# Altium PCB UWB-NODE.PcbDoc
Units mm, origin at the board's own origin, x right, y up, seen from the top; angles counter-clockwise.
Board outline 54.72 x 25.93 mm, 2 copper layers (Top Layer, Bottom Layer); 44 components, 41 nets, 187 pads, 243 vias.
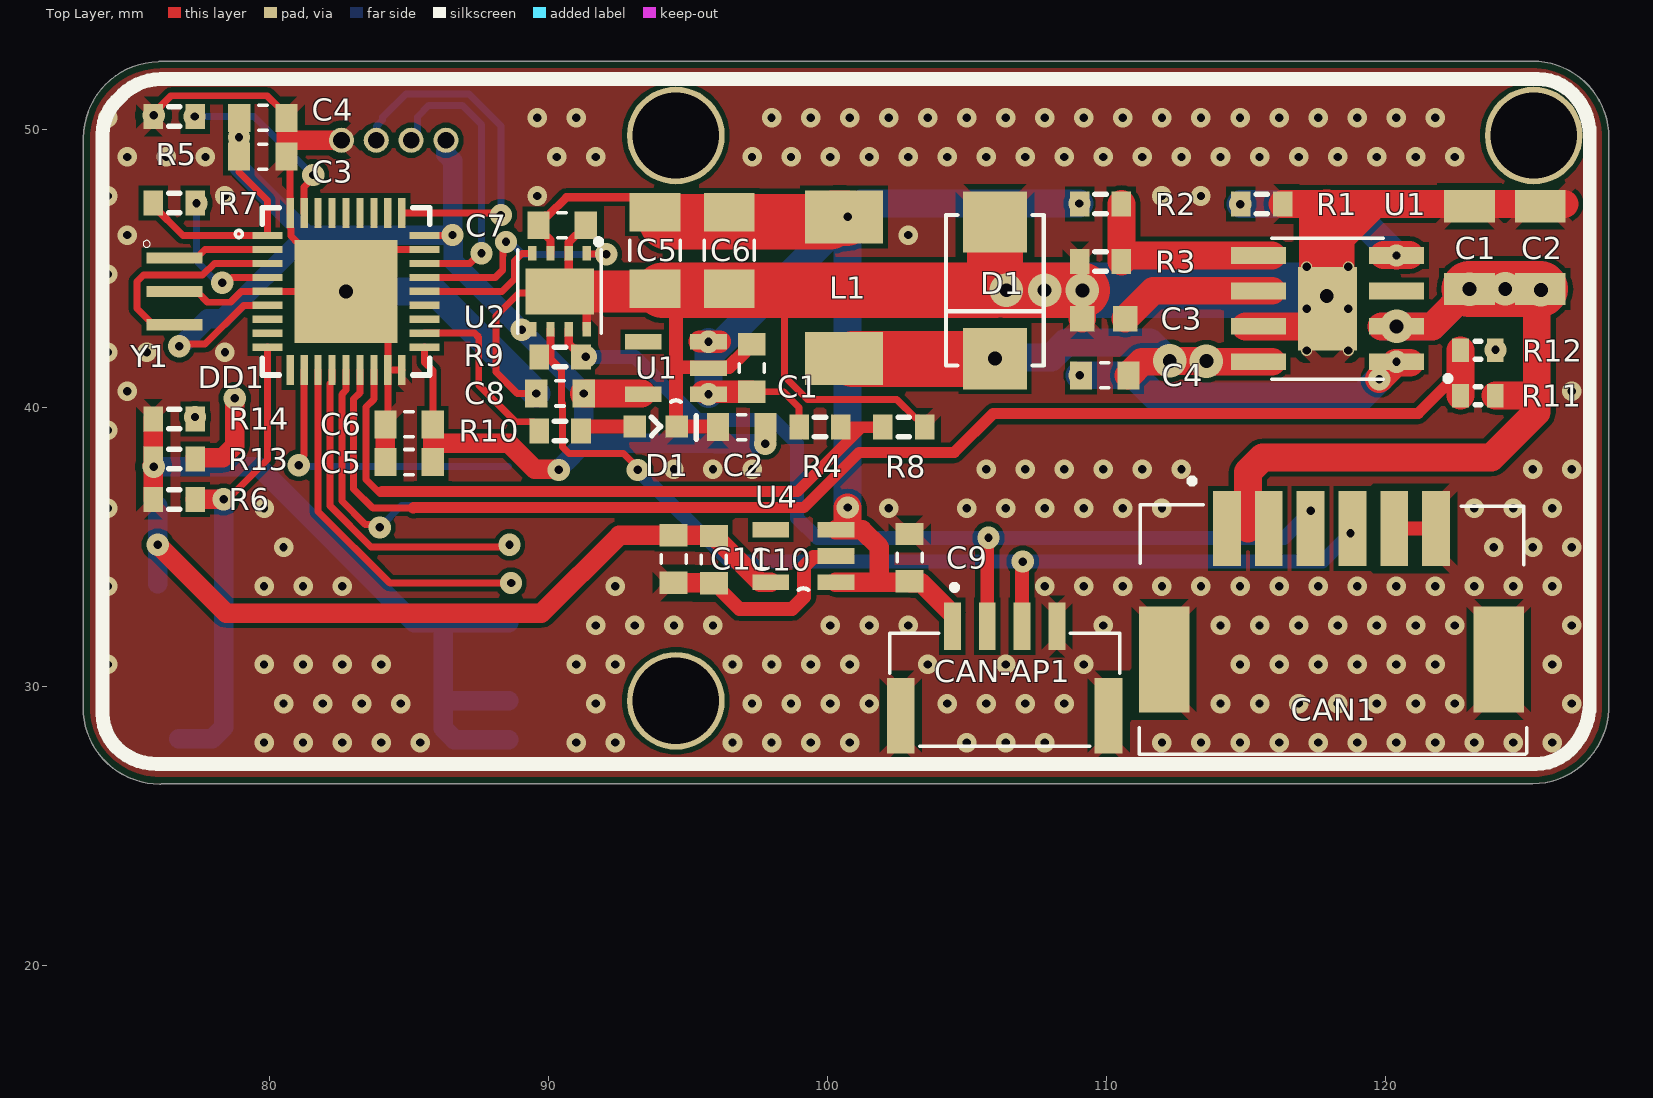
[diagram p0: Top Layer view]
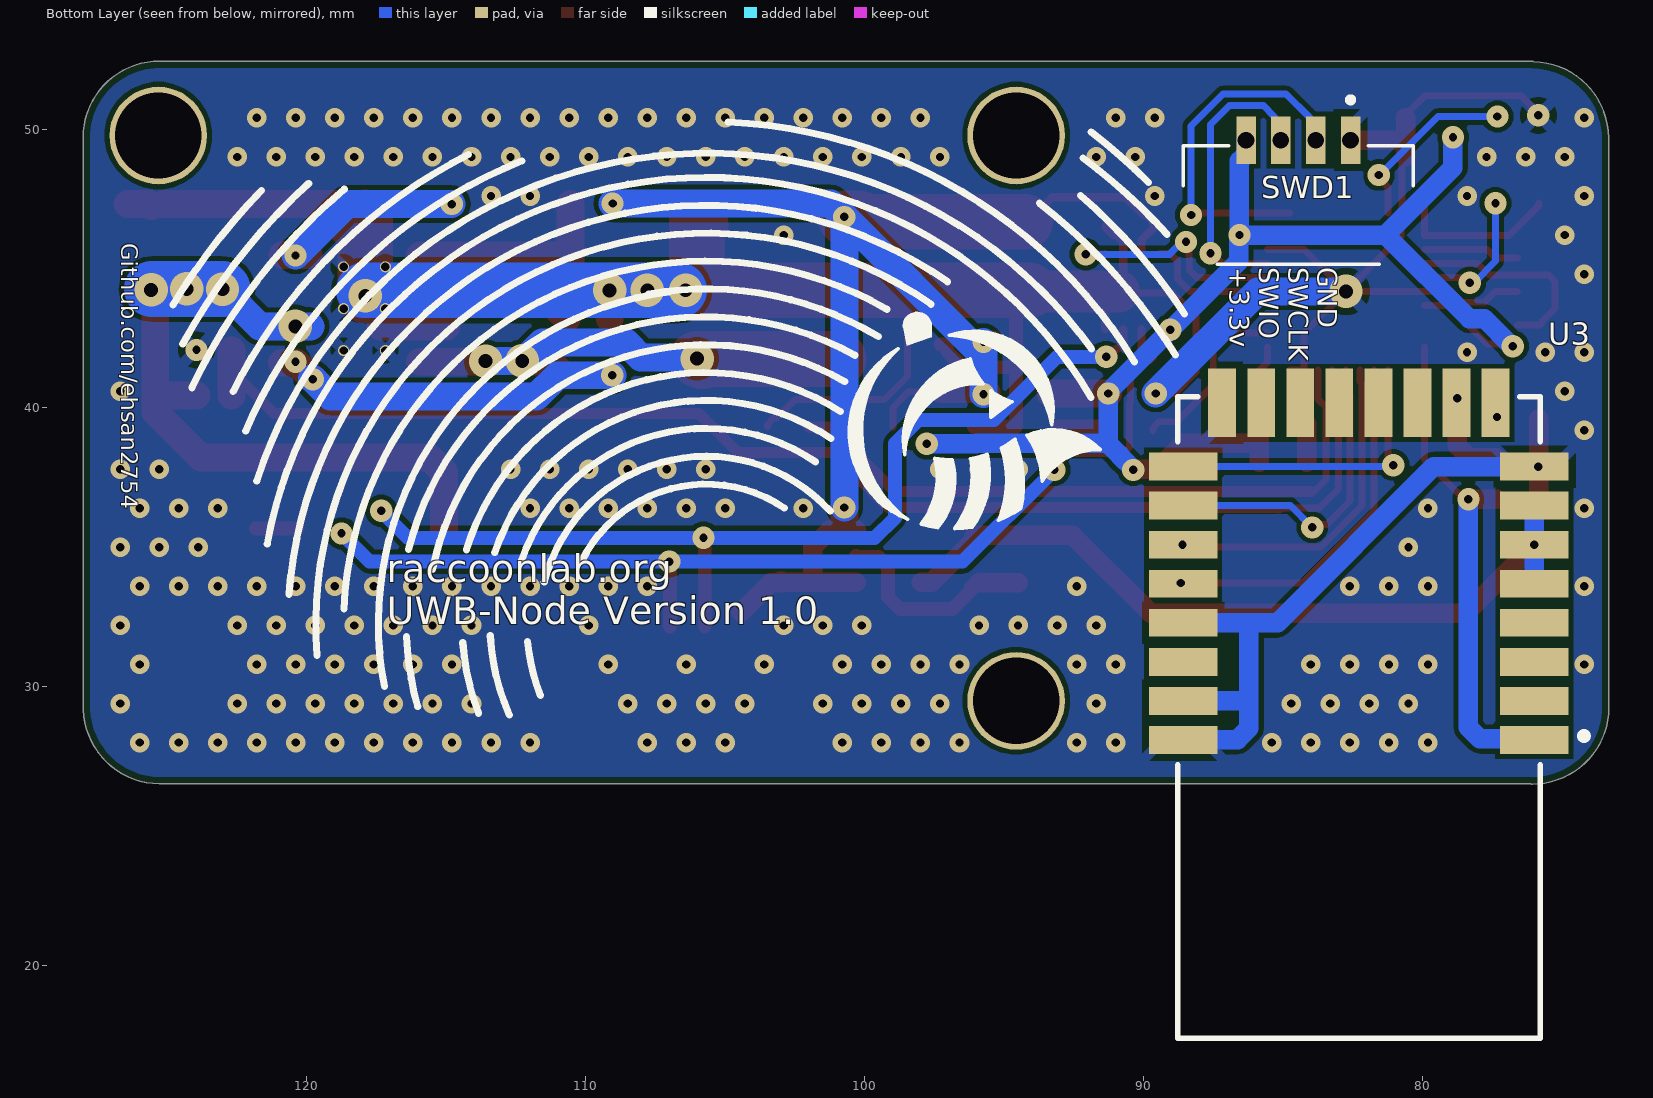
[diagram p1: Bottom Layer view, seen from below]
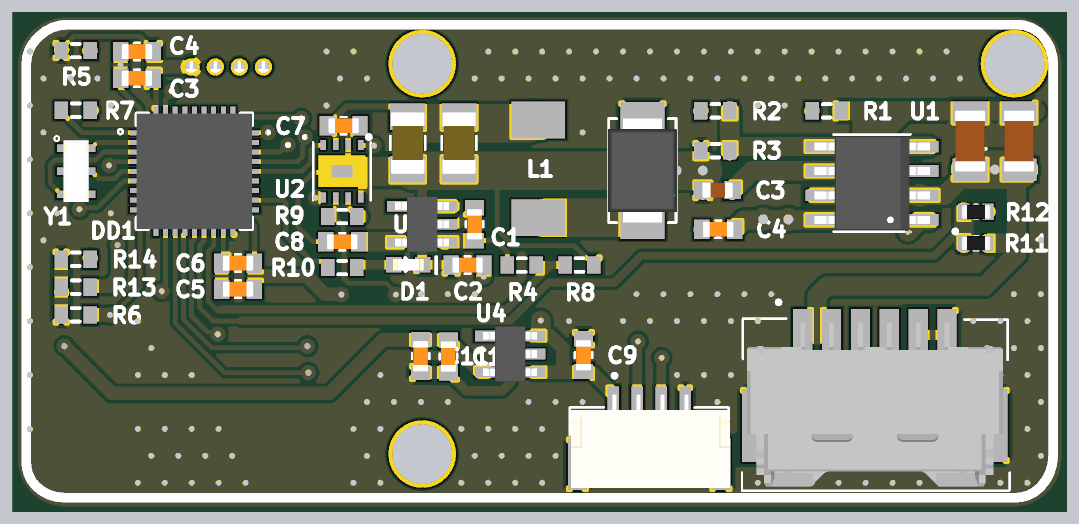
[diagram p2: 3D render of the assembled board from above, using the file's embedded part models]

## Layer stack, top to bottom
Top Solder: solder mask 0.0102, Solder Resist, Dk 3.5
Top Layer: signal copper 0.0356
Dielectric 1: dielectric 0.32, FR-4, Dk 4.8
Bottom Layer: signal copper 0.0356
Bottom Solder: solder mask 0.0102, Solder Resist, Dk 3.5

## Board outline
73.311,29.261 ccw(c76.061,29.261) 76.061,26.511 ccw(c76.061,26.761) 76.127,26.52 125.269,26.52 ccw(c125.269,26.77) 125.292,26.521 ccw(c125.269,29.271) 128.018,29.184 ccw(c127.77,29.22) 128.02,29.22 128.02,49.599 ccw(c127.77,49.599) 128.02,49.619 ccw(c127.779,49.689) 128.029,49.689 ccw(c125.279,49.689) 125.279,52.439 ccw(c125.279,52.189) 125.21,52.429 ccw(c125.189,52.18) 125.189,52.43 76.08,52.43 ccw(c76.08,52.18) 76.004,52.419 ccw(c76.071,49.669) 73.321,49.696 ccw(c73.57,49.67) 73.32,49.67 73.32,29.328 ccw(c73.561,29.261)

## Design rules (kind name [scope] priority, off if disabled: settings)
BoardOutlineClearance [All] p1: gap=0.25 ignorepadtopadclearanceinfootprint=FALSE
Clearance [All] p1: gap=0.17 ignorepadtopadclearanceinfootprint=FALSE
ComponentClearance [All] p1: gap=0.254 collisioncheckmode=3 verticalgap=2540 showdistances=FALSE
FanoutControl Fanout_SOIC [IsSOIC] p3: bgadir=Out bgaviamode=Closest fanoutstyle=Auto fanoutdirection=Alternating viagrid=0.025 // Fanout_SOIC (Default Rule)
FanoutControl Fanout_Small [(CompPinCount < 5)] p4: bgadir=Out bgaviamode=Closest fanoutstyle=Auto fanoutdirection=OutThenIn viagrid=0.025 // Fanout_Small (Default Rule)
FanoutControl Fanout_Default [All] p5: bgadir=In bgaviamode=Closest fanoutstyle=Auto fanoutdirection=Alternating viagrid=0.025 // Fanout_Default (Default Rule)
HoleSize [All] p1: absolutevalues=TRUE maxlimit=4.5 minlimit=0.3 maxpercent=80.000 minpercent=20.000
HoleToHoleClearance [All] p1: gap=0.4 allowstackedmicrovias=TRUE
MinimumSolderMaskSliver [All] p1: minsoldermaskwidth=0.15
PlaneClearance [All] p1: clearance=0.2
PlaneConnect [All] p1: planeconnectstyle=Relief reliefexpansion=0.5 reliefentries=4 reliefconductorwidth=0.2 reliefairgap=0.25
PolygonConnect PolygonConnect_1 [InNet('GND')] p1: connectstyle=Relief reliefconductorwidth=0.4 reliefentries=4 polygonreliefangle="45 Angle" airgapwidth=0.254
PolygonConnect [All] p2: connectstyle=Relief reliefconductorwidth=0.3 reliefentries=4 polygonreliefangle="90 Angle" airgapwidth=0.16
RoutingCorners [All] p1: cornerstyle=45-Degree minsetback=2.5 maxsetback=2.5
RoutingPriority [All] p1 off: routingpriority=0
RoutingVias [All] p1: holewidth=0.3 width=0.7 viastyle="Through Hole" minholewidth=0.3 minwidth=0.7 maxholewidth=0.8 maxwidth=1.2
SilkToSilkClearance [All] p1: silktosilkclearance=0
SilkToSolderMaskClearance [IsPad] p1: minsilkscreentomaskgap=0 clearancetoexposedcopper=TRUE
SolderMaskExpansion [All] p1: expansion=0.1 istentingtop=FALSE
Width [All] p1: maxlimit=5 minlimit=0.17 preferedwidth=0.3
17 further rules are at their usual default settings.

## Classes and differential pairs
component class STM32F103T8: C1 C2 C3 C4 C5 C6 C7 C8 C9 C10 C11 CAN1 CAN-AP1 D1 DD1 R4 R5 R6 R7 R8 R9 R10 R11 R12 R13 R14 SWD1 U1 U2 U3 U4 Y1
component class DCDC-LMR16030: C1 C2 C3 C4 C5 C6 D1 L1 R1 R2 R3 U1

## Components (designator, comment, footprint, x,y, rotation, side; value= is the part's Value field where it differs from the comment)
C1 "GX035C104MAT2-500" *CAPC1608X90 97.29,41.43 r90 top value=0.1u
C1 "GRM31CR71H225KA88L" *CAP3216X125N 123.029,45.747 r90 top value=2.2u
C2 "GX035C104MAT2-500" *CAPC1608X90 96.93,39.31 r180 top value=0.1u
C2 "GRM31CR71H225KA88L" *CAP3216X125N 125.569,45.747 r90 top value=2.2u
C3 "GX035C104MAT2-500" *CAPC1608X90 79.753,49.01 r0 top value=0.1u
C3 "GRM188R71C105KA12D" CAPC1608X90N 109.913,43.199 r0 top value=1u
C4 "GX035C104MAT2-500" *CAPC1608X90 79.756,50.4 r0 top value=0.1u
C4 "GX035C104MAT2-500" *CAPC1608X90 109.948,41.167 r180 top value=0.1u
C5 "GX035C104MAT2-500" *CAPC1608X90 85.005,38.06 r180 top value=0.1u
C5 "GRM31CR61A476KE15L" *CAPC3216X125N 93.819,45.651 r90 top value=47u
C6 "GX035C104MAT2-500" *CAPC1608X90 85.005,39.41 r180 top value=0.1u
C6 "GRM31CR61A476KE15L" *CAPC3216X125N 96.486,45.651 r90 top value=47u
C7 "GX035C104MAT2-500" *CAPC1608X90 90.49,46.55 r0 top value=0.1u
C8 "GX035C104MAT2-500" *CAPC1608X90 90.417,40.52 r180 top value=0.1u
C9 "GX035C104MAT2-500" *CAPC1608X90 102.95,34.63 r90 top value=0.1u
C10 "GX035C104MAT2-500" *CAPC1608X90 95.93,34.56 r270 top value=0.1u
C11 "GX035C104MAT2-500" *CAPC1608X90 94.49,34.58 r270 top value=10UF
CAN1 "502585-0670" MOLEX_502585-0670 118.08,35.479 r0 top
CAN-AP1 "SM04B-GHS-TB(LF)(SN)-" JST_SM04B-GHS-TB(LF)(SN)- 106.36,29.89 r0 top
D1 "0603-LED-BLUE" *LEDM1608X80_LTE-C1906R-14(Primary) 93.85,39.335 r180 top
D1 "SK56" *SMB_P6SMB62AT3G(Primary) 106.011,44.217 r270 top
DD1 "STM32F103T8" *QFN50P600X600X100-37N 82.74,44.18 r0 top
L1 "IHLP2020BZER100M01" IHLP 100.601,44.307 r270 top
R1 "Res3" J1-0603 115.577,47.317 r180 top value=56k
R2 "Res3" J1-0603 109.798,47.317 r180 top value=56k
R3 "RC0603FR-0710KL" J1-0603 109.798,45.25 r0 top value=10k
R4 "RC0603FR-0710KL" J1-0603 99.74,39.31 r180 top value=10k
R5 "RC0603FR-0710KL" J1-0603 76.577,50.45 r0 top value=10k
R6 "RC0603FR-0710KL" J1-0603 76.577,36.72 r0 top value=10k
R7 "RC0603FR-0710KL" J1-0603 76.577,47.35 r0 top value=10k
R8 "RC0603FR-0710KL" J1-0603 102.74,39.31 r180 top value=10k
R9 "Res3" J1-0603 90.417,41.83 r0 top value=120
R10 "Res3" J1-0603 90.417,39.18 r0 top value=330
R11 "180K" "RES 0603 (1608X06L)" 122.71,40.44 r0 top
R12 "10K" "RES 0603 (1608X06L)" 123.954,42.07 r180 top
R13 "RC0603FR-0710KL" J1-0603 76.577,38.165 r0 top value=10k
R14 "RC0603FR-0710KL" J1-0603 76.577,39.61 r0 top value=10k
SWD1 "BM04B-GHS-TBT(LF)(SN)(N)" JST_BM04B-GHS-holes 84.45,46.249 r180 bottom
U1 "SPX3819M5-L-3-3/TR" *SOT95P280X145-5N 94.57,41.43 r180 top value=3V3
U1 "LMR16030SDDAR" "*SOIC127P600X170-9N - duplicate" 117.937,43.561 r180 top
U2 "TJA1042" SOT782-1 90.4,44.18 r180 top
U3 "DWM1000" DECW-DWM1000-24_V 82.28,28.895 r0 bottom
U4 "SPX3819M5-L-3-3/TR" *SOT95P280X145-5N 99.14,34.69 r180 top value=3V3
Y1 "CSTCE8M00G55-R0" *OSC_CSTCE8M00G55-R0 76.59,44.18 r270 top

## Footprints (in the part's own frame and the unit in brackets; to place one, negate y for a bottom-side part, rotate by r counter-clockwise, add the part's x,y. Pads: shape width x height; smd on the part's side, far side on the other; paste and mask are expansions set on the pad)
*CAP3216X125N [mm]
  rect 1.15x1.82 smd: 1(-1.485,0) 2(1.485,0)
  body extent -1.6,-0.8 1.6,0.8, height 1.22
*CAPC1608X90 [mm]
  rect 0.8x1 smd: 1(-0.85,0) 2(0.85,0)
  silkscreen extent -0.15,-0.45 0.15,0.45, body extent -0.8,-0.4 0.8,0.41, height 0.88
*CAPC3216X125N [mm]
  rect 1.38x1.82 smd: 1(-1.369,0) 2(1.369,0)
  silkscreen extent -0.36,-0.9 0.36,0.9, body extent -1.6,-0.87 1.6,0.87, height 1.71
*LEDM1608X80_LTE-C1906R-14(Primary) [mm]
  rect 0.8x0.8 smd: A(0.75,0) C(-0.75,0)
  silkscreen extent -1.45,-0.38 0.16,0.45, body extent -0.8,-0.3 0.8,0.3, height 1.15
*OSC_CSTCE8M00G55-R0 [mm]
  rect 0.4x2 smd: 1(-1.2,0) 2(0,0) 3(1.2,0)
  silkscreen extent -1.83,-1.13 -1.57,-0.87, body extent -1.6,-0.65 1.6,0.65, height 1
*QFN50P600X600X100-37N [mm]
  rect 1.08x0.26 smd: 1(-2.815,2) 2(-2.815,1.5) 3(-2.815,1) 4(-2.815,0.5) 5(-2.815,0) 6(-2.815,-0.5) 7(-2.815,-1) 8(-2.815,-1.5) 9(-2.815,-2) 19(2.815,-2) 20(2.815,-1.5) 21(2.815,-1) 22(2.815,-0.5) 23(2.815,0) 24(2.815,0.5) 25(2.815,1) 26(2.815,1.5) 27(2.815,2)
  rect 0.26x1.08 smd: 10(-2,-2.815) 11(-1.5,-2.815) 12(-1,-2.815) 13(-0.5,-2.815) 14(0,-2.815) 15(0.5,-2.815) 16(1,-2.815) 17(1.5,-2.815) 18(2,-2.815) 28(2,2.815) 29(1.5,2.815) 30(1,2.815) 31(0.5,2.815) 32(0,2.815) 33(-0.5,2.815) 34(-1,2.815) 35(-1.5,2.815) 36(-2,2.815)
  rect 3.7x3.7 smd: 37(0,0)
  silkscreen extent -3.97,-3 3,3, body extent -3,-3 3,3, height 1
*SMB_P6SMB62AT3G(Primary) [mm]
  rect 2.2x2.3 smd: A(-2.45,0) C(2.45,0)
  silkscreen extent -2.7,-1.75 2.7,1.75, body extent -2.72,-1.78 2.72,1.78, height 2.49
"*SOIC127P600X170-9N - duplicate" [mm]
  rect 1.97x0.6 smd: 1(-2.475,1.905) 2(-2.475,0.635) 3(-2.475,-0.635) 4(-2.475,-1.905) 5(2.475,-1.905) 6(2.475,-0.635) 7(2.475,0.635) 8(2.475,1.905)
  round 0.4 hole 0.3: 9(-0.75,1.5) 9(-0.75,0) 9(-0.75,-1.5) 9(0.75,1.5) 9(0.75,0) 9(0.75,-1.5)
  rect 2.13x3 smd: 9(0,0)
  silkscreen extent -4.42,-2.52 2,2.6, body extent -3,-2.45 3,2.45, height 1.69
*SOT95P280X145-5N [mil]
  rect 52x22 smd: 1(-46,37) 2(-46,0) 3(-46,-37) 4(46,-37) 5(46,37)
  silkscreen extent -7,46 7,48, body extent -55,-57 55,57, height 57
CAPC1608X90N [mm]
  rect 0.89x0.93 smd: 1(-0.77,0) 2(0.77,0)
  body extent -0.8,-0.4 0.8,0.4, height 0.9
DECW-DWM1000-24_V [mm] "SMD, 24-Leads, Body 23x13mm, Pitch 1.4mm"
  rect 2.45x1 smd: 1(-6.295,0.8) 2(-6.295,-0.6) 3(-6.295,-2) 4(-6.295,-3.4) 5(-6.295,-4.8) 6(-6.295,-6.2) 7(-6.295,-7.6) 8(-6.295,-9) 17(6.295,-9) 18(6.295,-7.6) 19(6.295,-6.2) 20(6.295,-4.8) 21(6.295,-3.4) 22(6.295,-2) 23(6.295,-0.6) 24(6.295,0.8)
  rect 1x2.45 smd: 9(-4.9,-11.295) 10(-3.5,-11.295) 11(-2.1,-11.295) 12(-0.7,-11.295) 13(0.7,-11.295) 14(2.1,-11.295) 15(3.5,-11.295) 16(4.9,-11.295)
  silkscreen extent -8.19,-11.5 6.5,11.5, body extent -6.5,-11.5 6.5,11.5, height 4
IHLP [mil]
  rect 75x110 smd: 1(-100,0) 2(100,0)
  body extent -100,-100 100,100, height 79
J1-0603 [mm] "Chip Resistor, Body 1.6x0.8mm, IPC High Density"
  rect 0.7x0.9 smd: 1(-0.75,0) 2(0.75,0)
  silkscreen extent -0.2,-0.35 0.2,0.35, body extent -0.85,-0.48 0.85,0.48, height 0.9
JST_BM04B-GHS-holes [mm]
  rect 0.7x1.7 / inner rect 0.6x1.7 / far side round 0.9 hole 0.6: 1(1.875,3.35) 2(0.625,3.35) 3(-0.625,3.35) 4(-1.875,3.35)
  silkscreen extent -4.13,-1.1 4.13,4.9, body extent -4.12,-1.02 4.12,3.93, height 4.15
JST_SM04B-GHS-TB(LF)(SN)- [mm]
  rect 0.6x1.7 smd: 1(-1.875,2.275) 2(-0.625,2.275) 3(0.625,2.275) 4(1.875,2.275)
  rect 1x2.7 smd: SH1(-3.725,-0.925) SH2(3.725,-0.925)
  silkscreen extent -4.13,-2.02 4.13,3.77, body extent -4.06,-2.16 4.19,2.69, height 4.35
MOLEX_502585-0670 [mm]
  rect 1x2.7 smd: 1(-3.75,0.2) 2(-2.25,0.2) 3(-0.75,0.2) 4(0.75,0.2) 5(2.25,0.2) 6(3.75,0.2)
  rect 1.8x3.8 smd: P1(-6,-4.5) P2(6,-4.5)
  silkscreen extent -6.9,-7.9 7,2, body extent -6.65,-7.68 6.65,0.82, height 6.41
"RES 0603 (1608X06L)" [mm] "Chip Resistor, 2-Leads, Body 1.6x0.8mm, IPC High Density _ (0.063W)"
  rect 0.6x0.85 smd: 1(0,0) 2(1.244,0)
  silkscreen extent 0.52,-0.33 0.72,0.33, body extent -0.14,-0.38 1.38,0.38, height 0.45
SOT782-1 [mm]
  rect 0.3x0.525 smd: 1(-0.975,-1.362) 2(-0.325,-1.362) 3(0.325,-1.362) 4(0.975,-1.362) 5(0.975,1.362) 6(0.325,1.362) 7(-0.325,1.362) 8(-0.975,1.362)
  rect 2.45x1.65 smd paste-2: P$9(0,0)
  silkscreen extent -1.5,-1.88 1.5,1.5, body extent -1.52,-1.52 1.52,1.52, height 0.85

## Part data
C1 C2 C3 C4 C4 C5 C6 C7 C8 C9 C10 C11: "Cap Thin Film 0.1uf 50v 0603", Package="0603 AVX", MF=AVX, Pacage Metric=1608, SnapEDA_Link=https://www.snapeda.com/parts/GX035C104MAT2-500/AVX/view-part/?ref=snap, Type=SMD
  C1 C2 C9 C10: MP=GX035C104MAT2-500
  C3 C4 C4 C5 C6 C7 C8: MP="GX035C104MAT2-500 or CL10B104JB8NNNC"
  C11: ChipDip_Link=https://www.chipdip.ru/product0/8004208718, MP=GX035C104MAT2-500
C1 C2: "1206 2.2 uF 50 V В±10% Tolerance X7R SMT Multilayer Ceramic Capacitor", Package="1206 Murata", MF="Murata Electronics", MP=GRM31CR71H225KA88L, SnapEDA_Link=https://www.snapeda.com/parts/GRM31CR71H225KA88L/Murata%20Electronics%20North%20America/view-part/?ref=snap, Type=SMD
C3: "SMD Capacitor X7R(EIA) with Capacitance: 1.0uF Tol. 10%. Rated Voltage: 16Vdc", Package=0603, ChipDip_Link=https://www.chipdip.ru/product/grm188r71c105ka12d, HelpURL=https://static.chipdip.ru/lib/428/DOC005428493.pdf, MF="Murata Electronics", MP=GRM188R71C105KA12D, Pacage Metric=1608, SnapEDA_Link=https://www.snapeda.com/parts/GRM188R71C105KA12D/Murata%20Electronics%20North%20America/view-part/228340/?ref=snap, Type=SMD
C5 C6: "Multilayer Ceramic Capacitor, GRM Series, 47 - F, - 10%, X5R, 10 V, 1206 [3216 Metric]", Package="1206 Murata Electronics", MF="Murata Electronics", MP=GRM31CR61A476KE15L, SnapEDA_Link=https://www.snapeda.com/parts/GRM31CR61A476KE15L/Murata%20Electronics%20North%20America/view-part/?ref=snap, Type=SMD
CAN1: "1.50mm Pitch, CLIK-Mate PCB Receptacle, Single Row, Surface Mount, Right-Angle, Tin Plating, Positive Lock, 6 Circuits, Natural", Package=None, MF=Molex, MP=502585-0670, SnapEDA_Link=https://www.snapeda.com/parts/502494-0670/Molex/view-part/?ref=snap, System=Connector, Type=SMD
CAN-AP1: "Connector Header Surface Mount, Right Angle 4 position 0.049 _1.25mm_", Package=None, ChipDip_Link=https://www.chipdip.ru/product/sm04b-ghs-tb-lf-sn-gh-1.25mm-header-side-ent, HelpURL=http://www.farnell.com/datasheets/2082975.pdf, MF="JST Sales", MP=SM04B-GHS-TB(LF)(SN), SnapEDA_Link=https://www.snapeda.com/parts/SM04B-GHS-TB%28LF%29%28SN%29-/JST%20Sales%20America%20Inc./view-part/2759740/?ref=snap, System=Connector
D1: library part LTE-C1906R-14, "LED IrLED Chip LED 2-Pin SMD T/R", Package="0603 Lite-On", MP=0603-LED-BLUE, SnapEDA_Link=https://www.snapeda.com/parts/LTE-C1906R-14/Lite-On%20Inc./view-part/?ref=snap, Type=SMD
D1: "Диод Шоттки 5А 60В [SMB / DO-214AA]", Package="DO-214 Littelfuse", ChipDip_Link=https://www.chipdip.ru/product/sk56, MF="Littelfuse Inc.", MP=SK56, SnapEDA_Link=https://www.snapeda.com/parts/P6SMB62AT3G/Littelfuse%20Inc./view-part/?ref=snap, Type=SMD
DD1: "STM32F103T8U6, Микроконтроллер 32BIT ARM 64K FLASH [VFQFPN-36]", Package=VFQFPN-36, ChipDip_Link=https://www.chipdip.ru/product/stm32f103t8u6-2, HelpURL=http://www.st.com/stonline/products/literature/ds/13587.pdf, MF=STM, MP=STM32F103T8U6, SnapEDA_Link=https://www.snapeda.com/parts/STM32F103T8U6TR/STMicroelectronics/view-part/?ref=search&t=STM32F103T8U6, Type=SMD
L1: "10ÂµH Shielded Molded Inductor 2.3A 199mOhm Max Nonstandard", Package="Nonstandard Vishay", ChipDip_Link=https://www.chipdip.ru/product/ihlp2020bzer100m11-inductor-ihlp-smd-2020-10, HelpURL=http://www.vishay.com/docs/34253/ihlp-2020bz-01.pdf, MF="Vishay Dale", MP=IHLP2020BZER100M01, SnapEDA_Link=https://www.snapeda.com/parts/IHLP2020BZER100M01/Vishay%20Dale/view-part/44808/?ref=snap, Type=SMD
R1 R2 R10: "Resistor", Package=R0603, Pacage Metric=1608, Type=SMD
  R1 R2: ChipDip_Link=https://www.chipdip.ru/product0/9000079754, HelpURL=https://www.chipdip.ru/product0/9000079754, MP=RC0603FR-0756KL
  R10: ChipDip_Link=https://www.chipdip.ru/product0/9000079628, HelpURL=https://www.chipdip.ru/product0/9000079628, MP=RC0603FR-07330RL
R3 R4 R5 R6 R7 R8 R13 R14: "10 kOhms 1 0.1 W 1 10 W Chip Resistor 0603 1608 Metric Thick Film", Package=R0603, ChipDip_Link=https://www.chipdip.ru/product0/9000079736, HelpURL=https://www.chipdip.ru/product0/9000079736, MF="Yageo or NXP", MP="10K 1% 0603", Pacage Metric=1608, SnapEDA_Link=https://www.snapeda.com/parts/RC0603FR-0710KL/Yageo/view-part/?ref=dk&t=RC0603FR-0710KL&con_ref=None, Type=SMD
R9: "120 Ohms 1 0.1 W 1 10 W Chip Resistor 0603 1608 Metric Thick Film", Package=R0603, ChipDip_Link=https://www.chipdip.ru/product0/9000079618, HelpURL=https://www.chipdip.ru/product0/9000079618, MP=RC0603FR-07120RL, Pacage Metric=1608, Type=SMD
R11 R12: library part Resistor, "Resistor", Power="1/8 W", Tolerance=5%
SWD1: "Conn Shrouded Header HDR 4 POS 1.25mm Solder ST SMD Reel", Package=None, Instructions="Do not install", MF="JST Sales", MP=SM04B-GHS-TB(LF)(SN), SnapEDA_Link=https://www.snapeda.com/parts/BM04B-GHS-TBT%28LF%29%28SN%29%28N%29/JST%20Sales%20America%20Inc./view-part/?ref=snap, System=Connector, Type=SMD
U1 U4: library part SPX3819M5-L, "Low Dropout Voltage Regulator, Adjustable 0.5A, В±1%, 2.5 to 16 Vin, 5-Pin SOT-23", Package="SOT-23-5 Exar", ChipDip_Link=https://www.chipdip.ru/product1/8003455237, HelpURL=http://www.farnell.com/datasheets/2614478.pdf, MF="MaxLinear, Inc.", MP=SPX3819M5-L-3-3/TR, SnapEDA_Link=https://www.snapeda.com/parts/SPX3819M5-L/MaxLinear%2C%20Inc./view-part/?ref=snap, Type=SMD
U1: "LMR16030SDDAR, Conv DC-DC 4.3V to 60V Step Down Single-Out 1V to 50V 3A Automotive 8-Pin HSOP EP T/R", Package="PowerSOIC-8 Texas Instruments", ChipDip_Link=https://www.chipdip.ru/product1/8003448566, HelpURL=https://www.ti.com/lit/ds/symlink/lmr16030.pdf, MF="Texas Instruments", MP=LMR16030SDDAR, SnapEDA_Link=https://www.snapeda.com/parts/TPS54560DDA/Texas%20Instruments/view-part/?ref=snap, Type=SMD
U2: "1/1 Transceiver Half CANbus 8-SO", Package="VDFN-8 NXP USA", ChipDip_Link=https://www.chipdip.ru/product1/8002840332, HelpURL=https://static.chipdip.ru/lib/583/DOC001583059.pdf, MF="NXP USA", MP=TJA1042, SnapEDA_Link=https://www.snapeda.com/parts/TJA1042/NXP%20USA%20Inc./view-part/900919/?ref=snap, Type=SMD
U3: library part CMP-2000-05094-1, "DW M1000 IEEE 802.15.4 -2011 UWB Transceiver Module", Current - Receiving=64mA, Current - Transmitting=31mA, Frequency=3.5GHz~6.5GHz, Manufacturer=Decawave, Operating Temperature=-40degC~85degC, Package / Case=Module, Power - Output=-, Standard Package=500, Voltage - Supply=2.8V~3.6V, Antenna Type=Integrated,Chip, Category=RF/IFandRFID, Data Rate=6.8Mbps, Datasheet URL=http://www.decawave.com/sites/default/files/resources/dwm1000-datasheet-v1.3.pdf, Datasheet Version="Rev. V1.0, 12/2015", Design Resources=DevelopmentToolSelector, Family=RFTransceiverModules, Featured Product=ScenSorDWM1000Module, Manufacturer URL=http://www.decawave.com/, Memory Size=-, Modulation=BPM,BPSK, Mounting Type=SurfaceMount, Online Catalog=ScenSorDWM1000Module, Other Names=1479-1002-2RUPF-G001A, Packaging=Tape&Reel(TR), Protocol=IR-UWB, RF Family/Standard=802.15.4, Sensitivity=-, Serial Interfaces=SPI, Series=-
Y1: "Ceramic Resonator 8MHz ??0.5% _Tol_ ??0.2% _Stability_ 33pF 40Ohm 3-Pin CSMD T/R", Package="SMD-3 Murata", ChipDip_Link=https://www.chipdip.ru/product1/8001783721, HelpURL=https://www.murata.com/en-eu/api/pdfdownloadapi?cate=&partno=CSTCE8M00G55-R0, MF=Murata, MP=CSTCE8M00G55-R0, SnapEDA_Link=https://www.snapeda.com/parts/CSTCE8M00G55-R0/Murata%20Electronics%20North%20America/view-part/?ref=snap, Type=SMD

## Free pads (board coordinates)
  round 3.5 hole 3.1: 1(94.57,49.769) 2(94.57,29.495) 3(125.329,49.769)

## Via types
v1: diameter 0.7, hole 0.3, Top Layer to Bottom Layer, tented both sides, 188 vias
v2: diameter 0.8, hole 0.3, Top Layer to Bottom Layer, tented both sides, 43 vias
v3: diameter 1.2, hole 0.5, Top Layer to Bottom Layer, tented both sides, 12 vias

## Nets (pads, with @x,y where several pads share a name; then routed paths per layer and width w, separated by ;. In a path a pad name is that pad's centre, name@x,y a point inside that pad or via, vN(x,y) a via of type N, cw(c..) or ccw(c..) an arc to the next point about the centre after c; other vN are vias at no path point)
3.3: C2.1@97.78,39.31 C3.1@78.903,49.01 C4.1@78.906,50.4 C5.1@85.855,38.06 C6.1@85.855,39.41 C8.1 DD1.1 DD1.6 DD1.19 DD1.27 R7.1 SWD1.4 U1.5@93.402,40.49 U2.5 | length 60.6
  Top Layer w0.25: R7.1 75.827,47.25 76.896,46.18 DD1.1 79.925,47.445 78.903,48.467 C3.1@78.903,49.01 ; v2(76.765,42.21) 76.845,42.29 77.687,42.29 79.072,43.675 79.92,43.675 DD1.6 ; DD1.19 85.555,41.635 85.855,41.335 C6.1@85.855,39.41 ; DD1.27 85.56,46.185 86.546,46.185 v2(86.561,46.2)
  Top Layer w0.7: C5.1@85.855,38.06 85.855,38.735 ; C6.1@85.855,39.41 85.855,38.735 ; v2(90.37,37.777) 90.351,37.796 89.515,37.796 88.586,38.725 85.865,38.725 85.855,38.735
  Top Layer w1: v2(91.267,40.52) U1.5@93.34,40.52
  Bottom Layer w0.7: v2(76.765,42.21) 76.792,42.21 77.782,43.2 78.321,43.2 81.321,46.2 ; v2(78.905,49.705) 78.905,48.616 81.321,46.2 ; SWD1.4 86.325,49.099 86.561,48.863 v2(86.561,46.2) ; v2(90.37,37.777) 90.37,37.804 90.857,38.291 90.857,38.32 91.267,38.73 ; v2(97.77,38.71) 95.99,38.71 95.97,38.73 91.267,38.73 ; 81.321,46.2 v2(86.561,46.2) ; v2(86.561,46.2) 86.58,46.181 86.58,45.263 v2(89.043,42.801) 91.248,40.596 91.248,40.539 v2(91.267,40.52) 91.267,38.73
+3.3: C10.1 C11.1 U3.5 U3.6 U3.7 U4.5 | length 27.7
  Top Layer w0.7: v2(75.985,35.095) 78.44,32.64 89.75,32.64 92.54,35.43 C11.1 95.91,35.43 C10.1 96.03,35.41 96.08,35.36 96.08,35.26 97.59,33.75 U4.5
  Bottom Layer w0.7: U3.5 v2(75.985,35.095) U3.7
+5: C1.1@97.29,40.58 C5.2@93.819,47.02 C6.2@96.486,47.02 C7.1 C9.1 CAN-AP1.1 L1.1 R2.2 R4.2 U1.1@95.738,40.49 U1.3@95.738,42.37 U2.3 U4.1 U4.3 | length 54.1
  Top Layer w0.25: C1.1@97.29,40.58 98.427,40.58 98.99,40.017 R4.2
  Top Layer w0.3: U2.3 90.075,46.024 89.899,46.2 89.89,46.2 89.64,46.45 C7.1 89.64,46.65 89.89,46.9 89.99,46.9 90.64,47.55 93.289,47.55 C5.2@93.819,47.02
  Top Layer w0.7: U4.1 101.87,33.75 ; U4.3 101.25,35.63 101.87,35.01 101.87,33.75 ; C9.1 C9.1@103.05,33.78 ; CAN-AP1.1@104.435,32.665 103.37,33.73 103,33.73 102.98,33.75 101.87,33.75
  Top Layer w0.8: U1.3@95.43,42.38 96.14,42.38 U1.3@96.133,42.373 ; U1.1@95.53,40.58 C1.1@97.29,40.58 ; v2(95.738,42.37) U1.3@96.13,42.37
  Top Layer w1: U4.3@100.73,35.801 v2(100.73,36.43)
  Top Layer w2: C5.2@94.25,46.68 100.085,46.68 100.204,46.799 L1.1@100.679,46.799
  Bottom Layer w1: v2(95.738,40.49) v2(95.738,42.37) ; v2@95.89,42.01 v2(100.73,46.85) ; v2(100.73,36.43) v2(100.73,46.85) ; v2(109.04,47.33) 101.21,47.33 v2(100.73,46.85)
ADC_5V: DD1.16 R4.1 R8.2 | length 24.4
  Top Layer w0.25: DD1.16 83.74,40.312 83.46,40.032 83.46,37.43 83.954,36.936
  Top Layer w0.4: 84.026,37 98.93,37 101.24,39.31 ; R4.1 101.24,39.31 ; R8.2 101.24,39.31
ADC_CUR: DD1.10
ADC_VIN: DD1.15 R11.1 R12.2 | length 48
  Top Layer w0.25: DD1.15 83.24,40.544 83.011,40.315 83.011,37.099 83.7,36.41 85.15,36.41
  Top Layer w0.4: 85.15,36.41 85.17,36.43 99.166,36.43 101.136,38.4 104.55,38.4 105.95,39.8 121.19,39.8 122.71,41.32 122.72,41.33
  Top Layer w1: R11.1 122.71,41.32 R12.2
BOOT0: DD1.35 R5.2 | length 6.6
  Top Layer w0.25: v2(77.31,50.45) R5.2 ; DD1.35 81.24,47.916 81.56,48.236 v2(81.56,48.351)
  Bottom Layer w0.25: v2(77.31,50.45) 79.433,50.45 81.532,48.351 v2(81.56,48.351)
CAN_H: CAN1.3 CAN-AP1.2 R9.2 U2.7 | length 35.2
  Top Layer w0.3: U2.7 90.725,42.306 90.901,42.13 90.967,42.13 91.167,41.93 R9.2
  Top Layer w0.5: R9.2 v2(91.34,41.83) ; CAN-AP1.2 105.735,35.295 v2(105.78,35.34) ; v2(117.34,36.31) CAN1.3@117.35,36.32
  Bottom Layer w0.5: v2(91.34,41.83) 93.098,41.83 95.357,39.57 98.07,39.57 98.92,38.72 98.92,36.06 99.64,35.34 v2(105.78,35.34) 116.37,35.34 v2(117.34,36.31)
CAN_L: CAN1.4 CAN-AP1.3 R9.1 U2.6 | length 37.7
  Top Layer w0.25: 90.219,41.585 90.255,41.585 90.472,41.369 90.472,40.191 90.501,40.162 90.501,38.602 90.733,38.37 92.699,38.37 93.2,37.869 v2(93.2,37.777)
  Top Layer w0.3: R9.1 89.767,41.729 90.075,41.729 ; U2.6 90.075,41.729 ; 90.261,41.543 90.219,41.585 90.075,41.729
  Top Layer w0.5: CAN-AP1.3 106.985,34.465 v2(107.01,34.49)
  Bottom Layer w0.5: v2(93.2,37.777) 96.487,34.49 117.75,34.49 v2(118.76,35.5)
CAN_RXD: DD1.23 U2.4 | length 4.8
  Top Layer w0.25: DD1.23 88.33,44.18 88.781,44.631 88.781,45.271 89.046,45.536 89.419,45.536 U2.4
CAN_TXD: DD1.24 U2.1 | length 8.5
  Top Layer w0.25: DD1.24 88.093,44.68 88.361,44.948 88.361,45.445 88.375,45.459 88.375,45.848 v2(88.48,45.953) ; U2.1 91.391,45.526 92.054,45.526 v2(92.07,45.51)
  Bottom Layer w0.25: v2(88.48,45.953) 88.629,45.953 89.072,45.51 v2(92.07,45.51)
FB: R2.1 R3.2 U1.5@115.462,45.466 | length 7.6
  Top Layer w1: R2.1 R3.2 110.764,45.466 115.462,45.466 U1.5@115.95,45.466
GND: C1.2 C2.2 C3.1@109.143,43.199 C3.2@80.603,49.01 C4.2@80.606,50.4 C5.1@93.819,44.282 C5.2@84.155,38.06 C6.1@96.486,44.282 C6.2@84.155,39.41 C7.2 C8.2 C9.2 C10.2 C11.2 CAN1.5 CAN1.6 CAN1.P1 CAN1.P2 CAN-AP1.4 CAN-AP1.SH1 CAN-AP1.SH2 D1.A@106.011,46.667 D1.C@94.6,39.335 DD1.5 DD1.17 DD1.18 DD1.26 DD1.36 DD1.37 R1.1 R3.1 R5.1 R6.1 R8.1 R12.1 R13.1 R14.1 SWD1.1 U1.2@95.738,41.43 U1.7 U1.9 U2.2 U2.8 U2.P$9 U3.8 U3.16 U3.21 U3.23 U3.24 U4.2 Y1.2 | length 154
  Top Layer w0.25: R5.1@75.827,50.5 75.827,50.55 76.472,51.195 79.911,51.195 80.331,50.775 80.606,50.5 C4.2@80.606,50.4 ; Y1.2 77.39,44.18 77.78,43.79 78.593,43.79 78.983,44.18 DD1.5 v3(82.74,44.18) ; C3.2@80.74,48.847 DD1.36 80.745,46.99 80.745,46.447 80.76,46.432 80.76,46.16 81.015,45.905 81.159,45.762 v3(82.74,44.18) ; C6.2@84.155,39.41 84.24,39.495 DD1.17 ; DD1.18 DD1.17 ; DD1.26 84.24,45.68 v3(82.74,44.18) ; v2(89.567,40.52) 88.881,40.52 88.12,41.281 88.12,43.3 88.946,44.126 90.346,44.126 U2.P$9 ; 98.47,44.217 98.47,41.131 99.291,40.31 102.49,40.31 103.165,39.635 103.265,39.635 103.49,39.41 R8.1 ; v3(82.74,44.18) 84.24,42.68 DD1.17
  Top Layer w0.3: C7.2 91.34,46.45 91.09,46.2 90.99,46.2 90.725,45.935 U2.2 90.725,44.322 90.875,44.172 91.375,43.672 U2.8
  Top Layer w0.5: C5.1@93.819,44.282 94.039,44.282 94.104,44.217 94.479,43.842 94.479,43.622 94.571,43.53 94.571,41.459 ; D1.C@94.571,39.335 94.571,41.459 ; D1.C@94.6,39.335 96.055,39.335 C2.2@96.08,39.31 ; C10.2@95.91,33.73 96.01,33.73 96.18,33.56 96.18,33.46 96.85,32.79 98.74,32.79 99.17,33.22 99.17,34.32 99.511,34.661 100.279,34.661 U4.2 ; C1.2@97.29,42.28 97.19,42.28 97.04,42.13 97.04,42.03 96.469,41.459 95.768,41.459 95.738,41.43 95.709,41.459 94.571,41.459 ; CAN1.5 CAN1.6
  Top Layer w0.7: R13.1@75.79,37.95 R13.1@75.827,37.913 ; R6.1 R13.1@75.827,37.913 ; R14.1 R13.1 R13.1@75.827,37.913 ; R5.1@75.84,50.5 v2(75.845,50.495) ; v2(75.845,37.895) R13.1@75.827,37.913 ; C3.2@80.603,49.01 80.605,49.012 80.605,50.398 C4.2@80.606,50.4 ; 80.954,49.599 SWD1.1 ; C5.2@84.155,38.06 C6.2@84.155,39.41 ; C11.2 C10.2@95.91,33.73
  Top Layer w1: C3.1@109.143,43.199 v3(109.143,44.217) ; U1.7@115,42.926 U1.7 U1.9@117.372,42.926 ; R1.1 119.65,47.317 ; 118.096,46.217 118.55,46.217 119.65,47.317 ; C1.2@123.029,47.307 123.882,47.307 123.885,47.31 C2.2@125.156,47.31 ; C1.2@123.029,47.317 119.65,47.317 ; C2.2@125.569,47.232 125.644,47.307 126.422,47.307 C2.2@126.432,47.317
  Top Layer w1.5: U2.P$9@90.875,44.172 93.61,44.172 93.659,44.222 93.759,44.222 C5.1@93.819,44.282
  Top Layer w2: C5.1@94.104,44.217 98.47,44.217 v3@105.884,44.217 ; D1.A@105.884,46.567 105.984,46.667 D1.A@106.011,46.667 ; v3@106.011,44.22 D1.A@106.011,46.567 ; v3(106.42,44.22) v3(107.79,44.22) 109.14,44.22 v3(109.143,44.217) ; 117.909,46.83 117.91,46.829 v3(117.91,44.02)
  Bottom Layer w0.7: v2(75.845,37.895) U3.8 79.595,37.895 85.195,32.295 86.22,32.295 ; 86.54,29.495 U3.23 ; U3.24 88.562,28.108 86.63,28.108 86.22,28.518 86.22,32.295 ; U3.21 86.22,32.295
  Bottom Layer w1: v3(82.74,44.18) 85.906,44.18 v2(89.567,40.52)
  Bottom Layer w2: v3@106.65,44.22 v3(107.79,44.22) v3@117.95,44.22
  other v1: 79.8,28 81.2,28 82.6,28 84,28 85.4,28 91,28 92.4,28 96.6,28 98,28 99.4,28 100.8,28 105,28 106.4,28 107.8,28 112,28 113.4,28 114.8,28 116.2,28 117.6,28 119,28 120.4,28 121.8,28 123.2,28 124.6,28 126,28 80.5,29.4 81.9,29.4 83.3,29.4 84.7,29.4 91.7,29.4 97.3,29.4 98.7,29.4 100.1,29.4 101.5,29.4 104.3,29.4 105.7,29.4 107.1,29.4 108.5,29.4 114.1,29.4 115.5,29.4 116.9,29.4 118.3,29.4 119.7,29.4 121.1,29.4 122.5,29.4 126.7,29.4 74.2,30.8 79.8,30.8 81.2,30.8 82.6,30.8 84,30.8 91,30.8 92.4,30.8 96.6,30.8 98,30.8 99.4,30.8 100.8,30.8 103.6,30.8 106.4,30.8 109.2,30.8 114.8,30.8 116.2,30.8 117.6,30.8 119,30.8 120.4,30.8 121.8,30.8 126,30.8 91.7,32.2 93.1,32.2 94.5,32.2 95.9,32.2 100.1,32.2 101.5,32.2 102.9,32.2 109.9,32.2 114.1,32.2 115.5,32.2 116.9,32.2 118.3,32.2 119.7,32.2 121.1,32.2 122.5,32.2 126.7,32.2 74.2,33.6 79.8,33.6 81.2,33.6 82.6,33.6 92.4,33.6 107.8,33.6 109.2,33.6 110.6,33.6 112,33.6 113.4,33.6 114.8,33.6 116.2,33.6 117.6,33.6 119,33.6 120.4,33.6 121.8,33.6 123.2,33.6 124.6,33.6 126,33.6 80.5,35 123.9,35 125.3,35 126.7,35 74.2,36.4 79.8,36.4 102.2,36.4 105,36.4 106.4,36.4 107.8,36.4 109.2,36.4 110.6,36.4 112,36.4 123.2,36.4 124.6,36.4 126,36.4 94.5,37.8 95.9,37.8 97.3,37.8 105.7,37.8 107.1,37.8 108.5,37.8 109.9,37.8 111.3,37.8 112.7,37.8 125.3,37.8 126.7,37.8 74.2,39.2 74.9,40.6 126.7,40.6 74.2,42 75.6,42 78.4,42 74.2,44.8 74.9,46.2 102.9,46.2 74.2,47.6 78.4,47.6 89.6,47.6 112,47.6 113.4,47.6 74.9,49 76.3,49 77.7,49 90.3,49 91.7,49 97.3,49 98.7,49 100.1,49 101.5,49 102.9,49 104.3,49 105.7,49 107.1,49 108.5,49 109.9,49 111.3,49 112.7,49 114.1,49 115.5,49 116.9,49 118.3,49 119.7,49 121.1,49 122.5,49 74.2,50.4 89.6,50.4 91,50.4 98,50.4 99.4,50.4 100.8,50.4 102.2,50.4 103.6,50.4 105,50.4 106.4,50.4 107.8,50.4 109.2,50.4 110.6,50.4 112,50.4 113.4,50.4 114.8,50.4 116.2,50.4 117.6,50.4 119,50.4 120.4,50.4 121.8,50.4
  other v2: 123.96,42.08
IRQ: DD1.9 R6.2 U3.1 | length 17.2
  Top Layer w0.25: v2(78.35,36.72) 78.49,36.72 79.925,38.155 DD1.9
  Top Layer w0.7: R6.2 v2(78.35,36.72)
  Bottom Layer w0.7: U3.1@76.751,28.136 77.94,28.136 78.35,28.546 v2(78.35,36.72)
LED: DD1.20 R10.1 | length 6.6
  Top Layer w0.25: DD1.20 87.354,42.68 87.5,42.534 87.5,40.822 88.817,39.505 89.442,39.505 89.667,39.28 R10.1
MISO/ADC_VC: DD1.13 U3.19 | length 12
  Top Layer w0.25: DD1.13 82.24,40.955 82.165,40.88 82.165,36.491 83.636,35.02 88.53,35.02 v2(88.605,35.095)
  Bottom Layer w0.25: U3.19 v2(88.605,35.095)
MOSI/ADC_MID: DD1.14 U3.18 | length 11.5
  Top Layer w0.25: DD1.14 82.74,40.638 82.591,40.489 82.591,36.659 83.43,35.82 83.845,35.82 v2(83.95,35.715)
  Bottom Layer w0.25: v2(83.95,35.715) 84.73,36.495 U3.18
NetC3_2: C3.2@110.683,43.199 U1.6 | length 5.7
  Top Layer w1: C3.2@110.683,43.199 111.687,44.202 U1.6@115.94,44.202
NetC4_1: C4.1@110.798,41.167 D1.C@106.011,41.767 L1.2 U1.8 | length 18.5
  Top Layer w1: C4.1@110.798,41.167 111.287,41.656 v3@112.28,41.656 ; v3(112.28,41.69) 112.29,41.68 v3(113.59,41.68) ; v3@113.59,41.656 U1.8 U1.8@115.94,41.656
  Top Layer w2: L1.2@100.931,41.757 D1.C@105.794,41.757 ; D1.C@105.794,41.677 ccw(c105.794,41.984) v3(106.011,41.767)
  Bottom Layer w1: v3(106.011,41.767) 106.049,41.805 108.031,41.805 108.565,42.34 111.576,42.34 v3@112.231,41.685 ; v3@112.28,41.685 113.585,41.685 v3(113.59,41.68)
NetC4_2: C4.2@109.098,41.167 U1.1@120.412,41.656 | length 12.7
  Top Layer w1: v2(119.789,41.033) 120.376,41.62 U1.1@120.89,41.62
  Bottom Layer w1: v2(109.05,41.17) 111.004,41.17 111.764,40.41 119.166,40.41 v2(119.789,41.033) v2@119.813,41.057
  other v2: 120.412,41.656
NetD1_A: D1.A@93.1,39.335 R10.2 | length 2
  Top Layer w0.5: R10.2 91.167,39.23 91.267,39.33 92.95,39.33 92.955,39.335 D1.A@93.1,39.335
NetR1_2: R1.2 U1.4@120.412,45.466 | length 7.3
  Top Layer w1: U1.4@119.94,45.48 U1.4@120.398,45.48 ; v2(120.412,45.466) U1.4@120.398,45.48 ; U1.4@120.88,45.48 U1.4@120.398,45.48
  Bottom Layer w1: v2(114.81,47.31) 118.568,47.31 v2(120.412,45.466)
NetR13_2: R13.2 U3.10 | length 3.4
  Top Layer w0.7: R13.2 77.327,38.21 78.313,38.21 78.75,38.647 v2(78.75,40.35)
NetR14_2: R14.2 U3.9 | length 0.1
  Top Layer w0.7: R14.2 v2(77.327,39.677)
  Bottom Layer w0.7: v2(77.327,39.677) U3.9@77.33,39.68
NetU1_3: U1.3@120.412,44.196
NSS/ADC_VA: DD1.11 U3.17 | length 11
  Top Layer w0.25: v2(81.045,37.95) 81.045,38.099 81.24,38.294 DD1.11
  Bottom Layer w0.25: v2(81.045,37.95) 81.1,37.895 U3.17
OSC_IN: DD1.2 Y1.1 | length 3.5
  Top Layer w0.25: Y1.1 77.39,45.38 77.465,45.455 77.465,45.465 77.68,45.68 DD1.2
OSC_OUT: DD1.3 Y1.3 | length 7.5
  Top Layer w0.25: Y1.3 75.79,42.98 75.715,43.055 75.715,43.095 75.25,43.56 75.25,44.53 75.48,44.76 77.597,44.76 78.017,45.18 DD1.3
PWM2A: DD1.29
PWM2B: DD1.30
PWM3A: DD1.31
PWM3B: DD1.32
RX: DD1.22
SCK/ADC_VB: DD1.12 U3.20 | length 13.1
  Top Layer w0.25: DD1.12 81.74,36.29 84.31,33.72 v2(88.66,33.72)
SCL/PWM4A: DD1.33
SDA/PWM4B: DD1.34
STM_NRST: DD1.4 R7.2 | length 5
  Top Layer w0.25: v2(78.305,44.485) 78.454,44.485 78.649,44.68 DD1.4
  Bottom Layer w0.25: v2(77.38,47.34) 77.38,45.262 78.156,44.485 v2(78.305,44.485)
SWDIO: DD1.25 SWD1.3 | length 10.5
  Top Layer w0.25: DD1.25 87.179,45.18 87.543,45.545 v2(87.6,45.545)
  Bottom Layer w0.25: SWD1.3 85.3,49.824 85.3,50.44 85.7,50.84 86.92,50.84 87.6,50.16 v2(87.6,45.545)
SWLK: DD1.28 SWD1.2 | length 12.8
  Top Layer w0.25: DD1.28 88.22,46.995 v2(88.295,46.92)
  Bottom Layer w0.25: SWD1.2 83.825,50.099 84.05,50.324 84.05,50.424 84.886,51.26 87.15,51.26 88.295,50.115 v2(88.295,46.92)
TX: DD1.21
Vin: C1.1@123.029,44.262 C2.1@125.569,44.262 CAN1.1 CAN1.2 R11.2 U1.2@120.412,42.926 | length 32
  Top Layer w1: 115.08,35.679 115.08,37.699 115.601,38.22 123.81,38.22 125.44,39.85 125.44,40.56 ; U1.2@119.868,42.925 U1.2@120.41,42.925 ; v3(120.412,42.926) 121.693,42.926 v3(123.029,44.262) ; R11.2 125.32,40.44 125.44,40.56 ; C2.1@125.8,44.187 125.753,44.234 v3(125.59,44.234) 125.487,44.234 125.44,44.187 125.44,40.56
  Top Layer w2: v3(123.029,44.262) 124.31,44.262 C2.1@125.562,44.262
  Bottom Layer w1: v3@119.87,42.926 v3(120.412,42.926) ; v3@120.41,42.925 121.691,42.925 v3@123.027,44.261
  Bottom Layer w2: v3(123.029,44.262) v3@125.562,44.262
  other v3: 124.31,44.27
pads on no net: DD1.7 DD1.8 U1.4@93.402,42.37 U3.2 U3.3 U3.4 U3.11 U3.12 U3.13 U3.14 U3.15 U3.22 U4.4

## Polygon pours and split planes (outlines as drawn)
GND on Top Layer "GND_L01_P000" (solid, pour order 0): 70.42,53.18 70.42,23.36 131.85,23.36 131.85,53.18
GND on Bottom Layer "GND_L02_P001" (solid, pour order 1): 67.04,53.28 137.12,53.28 137.12,20.44 64.49,20.44 64.49,53.18

## Silkscreen, mask and mechanical layers (free items; w line width, h text height)
Top Overlay:
  lines w0.5: 76.1,51.79 ccw(c76.1,49.81) 74.7,51.21 74.52,51.03 ccw(c75.751,49.799) 74.01,49.799 74.01,29.037 ccw(c75.717,29.037) 74.51,27.83 ccw(c75.959,29.279) 75.959,27.23 125.395,27.23 ccw(c125.395,29.005) 126.65,27.75 ccw(c124.984,29.416) 127.34,29.416 127.34,49.783 ccw(c125.223,49.783) 126.72,51.28 ccw(c125.465,50.025) 125.465,51.8 123.56,51.8 ; 76.1,51.8 124.038,51.8
Bottom Overlay:
  region: 98.5,42.241 98.62,42.885 ccw(c98.621,42.89) 98.627,42.889 ccw(c98.115,42.931) 97.603,42.931 ccw(c97.608,42.931) 97.603,42.931 ccw(c98.115,42.931) 97.603,42.921 97.603,42.931 cw(c98.115,42.931) 97.603,42.931 97.603,42.921 97.607,42.538 cw(c97.612,42.538) 97.607,42.538 ccw(c97.612,42.538) 97.61,42.533 98.493,42.237 ccw(c98.495,42.242)
  region: 93.29,39.399 cw(c96.075,39.919) 96.975,42.606 ccw(c97.192,38.635)
  region: 97.972,35.833 cw(c96.79,39.967) 97.382,35.708 cw(c99.416,37.412) 96.863,38.134 ccw(c96.808,41.749) 97.481,38.197 ccw(c100.185,37.525)
  region: 96.776,35.668 cw(c96.79,39.967) 96.148,35.716 cw(c98.819,37.644) 95.6,38.342 ccw(c96.808,41.749) 96.205,38.184 ccw(c99.294,37.562)
  region: 93.639,37.374 cw(c96.582,37.311) 94.18,39.012 ccw(c93.223,36.903) 91.545,38.499 cw(c91.621,36.131)
  region: 94.717,40.221 ccw(c94.133,42.285) 95.483,40.618 95.483,39.662
  region: 95.201,35.972 cw(c96.79,39.967) 94.396,36.396 cw(c98.712,37.274) 94.61,38.879 ccw(c96.808,41.749) 95.102,38.561 ccw(c98.488,37.394)
  region: 98.564,38.313 ccw(c95.641,38.84) 96.211,41.755 cw(c94.133,42.285) 95.748,40.874 cw(c95.901,38.213)
  region: 98.452,36.002 ccw(c96.79,39.967) 99.315,36.487 ccw(c97.107,39.127) 98.795,42.125 cw(c96.208,39.199)
  lines w0.01: 97.608,42.931 97.612,42.538 98.495,42.242 ; 97.61,42.881 cw(c98.115,42.931) 98.621,42.89
  lines w0.127: 91.545,38.499 cw(c93.223,36.903) 94.18,39.012 ccw(c96.582,37.311) 93.639,37.374 ccw(c91.621,36.131) 91.545,38.499 ; 93.29,39.399 cw(c97.192,38.635) 96.975,42.606 ccw(c96.075,39.919) 93.29,39.399 ; 94.396,36.396 ccw(c96.79,39.967) 95.201,35.972 cw(c98.488,37.394) 95.102,38.561 cw(c96.808,41.749) 94.61,38.879 ccw(c98.712,37.274) 94.396,36.396 ; 94.717,40.221 ccw(c94.133,42.285) 95.483,40.618 95.483,39.662 94.717,40.221 ; 95.6,38.342 ccw(c98.819,37.644) 96.148,35.716 ccw(c96.79,39.967) 96.776,35.668 cw(c99.294,37.562) 96.205,38.184 cw(c96.808,41.749) 95.6,38.342 ; 95.748,40.874 ccw(c94.133,42.285) 96.211,41.755 cw(c95.641,38.84) 98.564,38.313 ccw(c95.901,38.213) 95.748,40.874 ; 96.863,38.134 ccw(c99.416,37.412) 97.382,35.708 ccw(c96.79,39.967) 97.972,35.833 cw(c100.185,37.525) 97.481,38.197 cw(c96.808,41.749) 96.863,38.134 ; 98.452,36.002 ccw(c96.79,39.967) 99.315,36.487 ccw(c97.107,39.127) 98.795,42.125 cw(c96.208,39.199) 98.452,36.002
  lines w0.254: 88.526,43.37 cw(c106.027,31.763) 92.256,47.617 ; 88.859,41.891 cw(c106.715,30.838) 93.729,47.342 ; 89.152,46.217 cw(c104.715,32.118) 92.166,48.956 ; 89.82,48.083 cw(c106.027,31.763) 91.877,49.895 ; 90.322,41.655 cw(c105.68,32.268) 104.892,50.251 ; 91.865,42.116 cw(c105.627,32.136) 121.8,37.376 ; 91.884,40.372 cw(c105.68,32.268) 121.424,35.117 ; 97.035,44.526 cw(c105.68,32.268) 120.643,33.319 ; 97.626,43.719 cw(c105.68,32.268) 119.633,31.122 ; 99.204,43.54 cw(c105.68,32.268) 118.669,32.795 ; 99.506,42.558 cw(c105.68,32.268) 107.743,44.089 ; 100.349,41.89 cw(c105.68,32.268) 116.355,34.923 ; 100.705,40.942 cw(c105.68,32.268) 115.491,34.204 ; 100.874,39.877 cw(c105.68,32.268) 114.284,34.907 ; 101.213,38.904 cw(c105.68,32.268) 113.266,34.809 ; 101.236,36.299 cw(c105.68,32.268) 111.492,33.757 ; 101.766,38.071 cw(c105.68,32.268) 112.3,34.543 ; 102.884,36.413 cw(c105.68,32.268) 110.157,34.494 ; 107.022,44.164 cw(c105.439,32.268) 117.226,30.017 ; 111.624,29.681 ccw(c105.119,32.268) 112.09,31.628 ; 112.287,48.859 cw(c105.627,32.136) 122.194,39.175 ; 112.739,28.995 ccw(c105.439,32.268) 113.428,31.839 ; 113.844,29.049 ccw(c105.439,32.268) 114.413,31.58 ; 114.208,49.088 cw(c105.627,32.136) 122.646,40.585 ; 116.028,29.289 ccw(c105.439,32.268) 116.43,31.805 ; 118.661,47.842 cw(c105.122,31.789) 124.127,40.725 ; 119.936,48.054 cw(c105.122,31.789) 124.455,42.29 ; 121.631,47.803 cw(c105.122,31.789) 124.798,43.699
  text "Github.com/ehsan2754" at 126.85,45.905 h1 r90
  text "GND / SWCLK / SWIO / +3.3v" at 86.9,45.05 h0.7 r90
  text "raccoonlab.org / UWB-Node Version 1.0" at 117.133,32.249 h1
Mechanical 2:
  lines w0.5: 73.561,29.261 ccw(c76.061,29.261) 76.061,26.761 ; 73.57,29.23 73.57,49.67 ; 73.571,49.669 cw(c76.071,49.669) 76.071,52.169 ; 76.03,26.77 125.269,26.77 ; 76.08,52.18 125.189,52.18 ; 125.269,26.771 ccw(c125.269,29.271) 127.769,29.271 ; 125.279,52.189 cw(c125.279,49.689) 127.779,49.689 ; 127.77,29.22 127.77,49.599